# Altium PCB MCU-Board.PcbDoc
Units mm, origin at the board's own origin, x right, y up, seen from the top; angles counter-clockwise.
Board outline 45 x 45 mm, 2 copper layers (Top Layer, Bottom Layer), stack 1.671 mm thick; 35 components, 30 nets, 207 pads, 4 vias.
Unrouted connection lines stored in the file: 103.
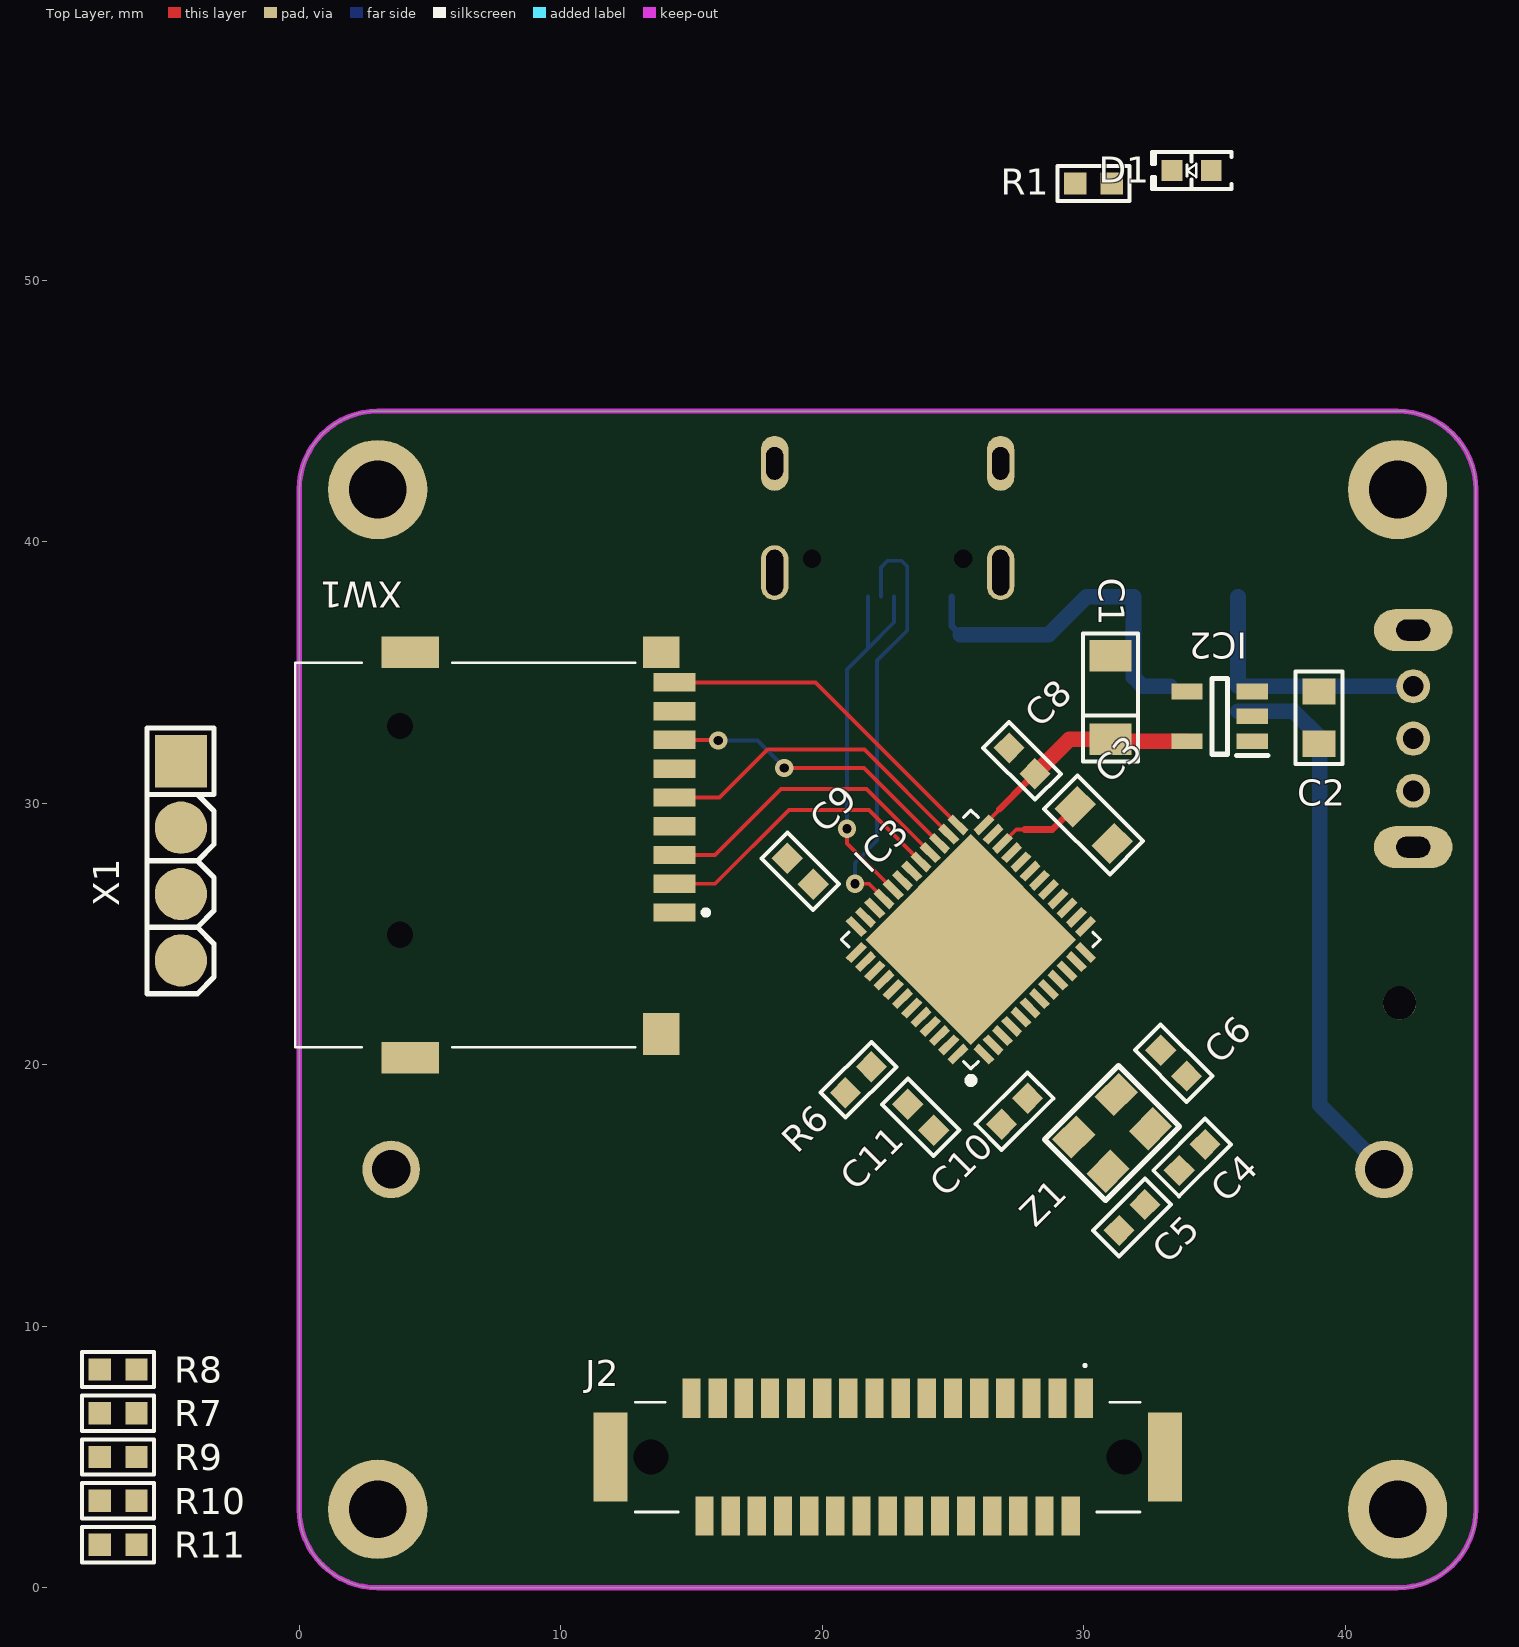
[diagram p0: Top Layer view]
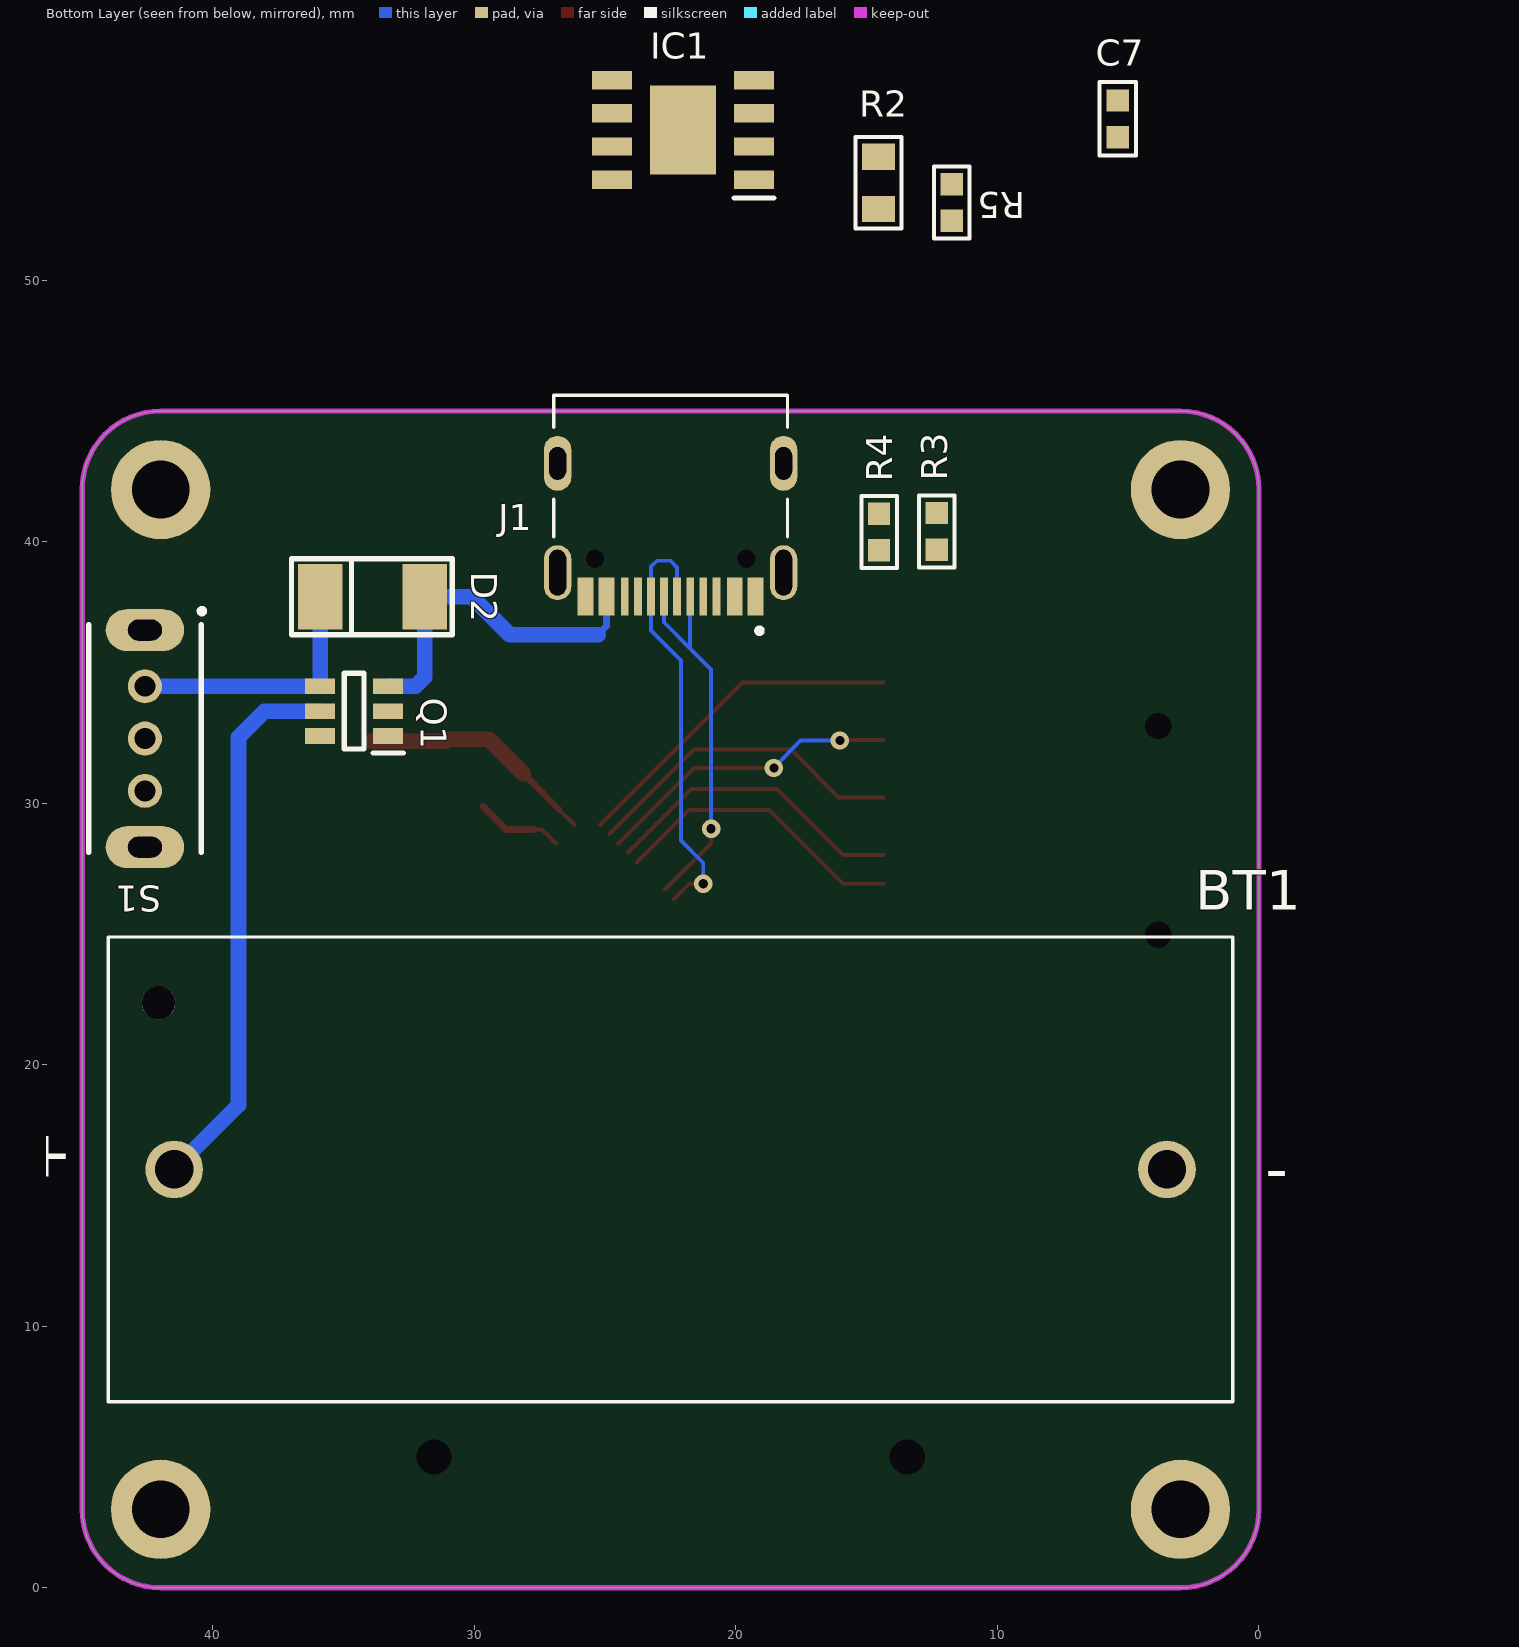
[diagram p1: Bottom Layer view, seen from below]

## Layer stack, top to bottom
Top Solder: solder mask 0.0102, Solder Resist, Dk 3.5
Top Layer: signal copper 0.0356
Dielectric 1: dielectric 1.6, FR-4, Dk 4.8
Bottom Layer: signal copper 0.0356
Bottom Solder: solder mask 0.0102, Solder Resist, Dk 3.5

## Board outline
0,3 0,42 cw(c3,42) 3,45 42,45 cw(c42,42) 45,42 45,3 cw(c42,3) 42,0 3,0 cw(c3,3)

## Design rules (kind name [scope] priority, off if disabled: settings)
BoardOutlineClearance [All] p1: gap=0.2 ignorepadtopadclearanceinfootprint=FALSE
Clearance [All] p1: gap=0.254 ignorepadtopadclearanceinfootprint=FALSE except(0.127: SMDPad-SMDPad; 0.33: Arc-THPad Track-THPad; 0.5: THPad-THPad)
HoleSize [All] p1: absolutevalues=TRUE maxlimit=6.3 minlimit=0.2 maxpercent=80.000 minpercent=20.000
MinimumSolderMaskSliver MinimumSolderMaskSliver_TSSOP [HasFootprint('20-TSSOP')] p1: minsoldermaskwidth=0.2
MinimumSolderMaskSliver [All] p2: minsoldermaskwidth=0.2
PolygonConnect PolygonConnectMSOP [HasFootprint('10-MSOP')] p1: thpad.connectstyle=Relief thpad.reliefconductorwidth=0.18 thpad.reliefentries=4 thpad.polygonreliefangle="90 Angle" thpad.airgapwidth=0.254 smdpad.connectstyle=Direct smdpad.reliefconductorwidth=0.18 smdpad.reliefentries=4 smdpad.polygonreliefangle="90 Angle" smdpad.airgapwidth=0.254 via.connectstyle=Direct via.reliefconductorwidth=0.18 via.reliefentries=4 via.polygonreliefangle="90 Angle" via.airgapwidth=0.254
PolygonConnect [All] p2: thpad.connectstyle=Relief thpad.reliefconductorwidth=0.254 thpad.reliefentries=4 thpad.polygonreliefangle="90 Angle" thpad.airgapwidth=0.254 smdpad.connectstyle=Relief smdpad.reliefconductorwidth=0.254 smdpad.reliefentries=4 smdpad.polygonreliefangle="90 Angle" smdpad.airgapwidth=0.254 via.connectstyle=Direct via.reliefconductorwidth=0.254 via.reliefentries=4 via.polygonreliefangle="90 Angle" via.airgapwidth=0.254
RoutingCorners [All] p1: cornerstyle=45-Degree minsetback=1.27 maxsetback=1.27
RoutingVias [All] p1: holewidth=0.35 width=0.7 viastyle="Through Hole" minholewidth=0.25 minwidth=0.5 maxholewidth=0.5 maxwidth=1
SMDEntry [All] p1: side=TRUE corner=FALSE anyangle=FALSE
SMDToCorner [All] p1: distance=0
SilkToSolderMaskClearance [IsPad] p1: minsilkscreentomaskgap=0.15 clearancetoexposedcopper=TRUE
SolderMaskExpansion [All] p1: expansion=0.05 istentingtop=FALSE
UnRoutedNet [All] p1: checkbadconnections=TRUE
Width Default [All] p1: maxlimit=0.6 minlimit=0.15 preferedwidth=0.254 minimp=50.000000 maximp=50.000000 favimp=50.000000
25 further rules are at their usual default settings.

## Components (designator, comment, footprint, x,y, rotation, side; value= is the part's Value field where it differs from the comment)
BT1 "BH123A" BAT_BH123A 22.5,16 r0 bottom locked
C1 "10u" "CAP: TANTAL-A" 31.025,34.05 r90 top
C2 "10u" "CAP: 0805" 39,33.275 r90 top
C3 "2.2u" "CAP: 0805" 30.378,29.168 r135 top
C4 "8p" "CAP: 0603" 34.144,16.458 r45 top
C5 "8p" "CAP: 0603" 31.846,14.16 r45 top
C6 "100n" "CAP: 0603" 33.437,20.064 r135 top
C7 "100n" "CAP: 0603" 5.4,56.175 r90 bottom
C8 "100n" "CAP: 0603" 27.639,31.624 r315 top
C9 "100n" "CAP: 0603" 19.161,27.403 r315 top
C10 "100n" "CAP: 0603" 27.355,18.226 r45 top
C11 "100n" "CAP: 0603" 23.768,17.995 r135 top
D1 "=VALUE" "LED 0603_1608" 34.125,54.2 r180 top
D2 "1N4007" "DIODE: SMA" 33.9,37.9 r0 bottom
IC1 "TP4056" SOIC127P600X175-9N 22.025,55.75 r0 bottom
IC2 "LP2981IM5X-3.3" SOT95P280X145-5N 35.2,33.325 r180 top
IC3 "STM32F401CCU6" QFN50P700X700X60-49N-D 25.686,24.792 r135 top
J1 "TYPE-C" HRO_TYPE-C-31-M-12 22.5,43 r0 bottom
J2 "DF9-31P-1V_32_" DF931P1V32 22.5,5 r180 top
Q1 "IRLMS6802TRPBF" SOT95P280X130-6N 34.6,33.525 r0 bottom
R1 "Resistor film, 680R, , 0201, 0.05W, -55...+125°C" "RES: 0603" 30.375,53.7 r180 top value=680R
R2 "Resistor film, 1.2k, , 0201, 0.05W, -55...+125°C" "RES: 0805" 14.55,53.725 r90 bottom value=1.2k
R3 "Resistor film, 5.1k, , 0201, 0.05W, -55...+125°C" "RES: 0603" 12.325,40.4 r90 bottom value=5.1k
R4 "Resistor film, 5.1k, , 0201, 0.05W, -55...+125°C" "RES: 0603" 14.525,40.375 r90 bottom value=5.1k
R5 "Resistor film, 100k, , 0201, 0.05W, -55...+125°C" "RES: 0603" 11.75,52.975 r90 bottom value=100k
R6 "Resistor film, 9.1k, , 0201, 0.05W, -55...+125°C" "RES: 0603" 21.384,19.429 r45 top value=9.1k
R7 "Resistor film, 9.1k, , 0201, 0.05W, -55...+125°C" "RES: 0603" -6.925,6.675 r180 top value=9.1k
R8 "Resistor film, 9.1k, , 0201, 0.05W, -55...+125°C" "RES: 0603" -6.925,8.35 r180 top value=9.1k
R9 "Resistor film, 9.1k, , 0201, 0.05W, -55...+125°C" "RES: 0603" -6.925,5 r180 top value=9.1k
R10 "Resistor film, 9.1k, , 0201, 0.05W, -55...+125°C" "RES: 0603" -6.925,3.325 r180 top value=9.1k
R11 "Resistor film, 9.1k, , 0201, 0.05W, -55...+125°C" "RES: 0603" -6.925,1.65 r180 top value=9.1k
S1 "OS102011MA1QN1" OS102011MA1QN1 42.6,32.475 r270 bottom
X1 "" "CON: PLS-4R" -4.525,27.8 r270 top
XW1 "TFP09-2-12B" TFP09212B -0.15,28.025 r0 top
Z1 "Crystal, 25MHz, 6pF, ±50ppm, case 2016, -30...+85°C" "OSC: 3225" 31.085,17.395 r45 top

## Footprints (in the part's own frame and the unit in brackets; to place one, negate y for a bottom-side part, rotate by r counter-clockwise, add the part's x,y. Pads: shape width x height; smd on the part's side, far side on the other; paste and mask are expansions set on the pad)
BAT_BH123A [mm]
  round 2.205 hole 1.47: 1(18.985,0) 2(-18.985,0)
  round 1.27 hole 1.27 unplated: ""(19.58,-6.37)
  silkscreen extent -21.5,-8.89 21.5,8.89, body extent -21.61,-9.1 21.71,9.15, height 14.25
"CAP: 0603" [mm]
  rect 0.85x0.85 smd: 1(-0.7,0) 2(0.7,0)
  silkscreen extent -1.4,-0.7 1.4,0.7, body extent -0.8,-0.4 0.8,0.4, height 0.3
"CAP: 0805" [mm]
  rect 1x1.25 smd: 1(-1,0) 2(1,0)
  silkscreen extent -1.78,-0.9 1.78,0.9, body extent -1,-0.62 1,0.63, height 0.78
"CAP: TANTAL-A" [mm]
  rect 1.2x1.6 smd: 1(-1.6,0) 2(1.6,0)
  silkscreen extent -2.45,-1.05 2.45,1.05, body extent -1.7,-0.84 1.7,0.84, height 1.71
"CON: PLS-4R" [mm] "PLS-4R 4 pin header"
  rect 2x2 smd: 1(-3.81,0)
  round 2 smd: 2(-1.27,0) 3(1.27,0) 4(3.81,0)
  silkscreen extent -5.08,-1.3 5.08,1.27
DF931P1V32 [mm]
  rect 0.7x1.5 smd: 1(-7.5,-2.25) 2(-7,2.25) 3(-6.5,-2.25) 4(-6,2.25) 5(-5.5,-2.25) 6(-5,2.25) 7(-4.5,-2.25) 8(-4,2.25) 9(-3.5,-2.25) 10(-3,2.25) 11(-2.5,-2.25) 12(-2,2.25) 13(-1.5,-2.25) 14(-1,2.25) 15(-0.5,-2.25) 16(0,2.25) 17(0.5,-2.25) 18(1,2.25) 19(1.5,-2.25) 20(2,2.25) 21(2.5,-2.25) 22(3,2.25) 23(3.5,-2.25) 24(4,2.25) 25(4.5,-2.25) 26(5,2.25) 27(5.5,-2.25) 28(6,2.25) 29(6.5,-2.25) 30(7,2.25) 31(7.5,-2.25)
  round 0.675 hole 1.35 unplated: MH1(-9.05,0) MH2(9.05,0)
  rect 1.3x3.4 smd: MP1(-10.6,0) MP2(10.6,0)
  silkscreen extent -9.65,-3.55 9.65,2.1, body extent -10.55,-2.81 10.55,2.79, height 3.29
"DIODE: SMA" [mm]
  rect 1.7x2.5 smd: 1(-2,0) 2(2,0)
  round 0.5 on Mech1: ""(2,0.9)
  silkscreen extent -3.05,-1.45 3.1,1.45, body extent -2.5,-1.35 2.5,1.35, height 2.28
HRO_TYPE-C-31-M-12 [mm]
  rect 0.6x1.45 smd: A1B12(-3.25,5.095) A4B9(-2.45,5.095) B1A12(3.25,5.095) B4A9(2.45,5.095)
  rect 0.3x1.45 smd: A5(-1.25,5.095) A6(-0.25,5.095) A7(0.25,5.095) A8(1.25,5.095) B5(1.75,5.095) B6(0.75,5.095) B7(-0.75,5.095) B8(-1.75,5.095)
  oval 1.05x2.1 hole 0.65 slot 1.75 at 90 deg: S1(-4.32,4.18) S2(4.32,4.18)
  oval 1.05x2.1 hole 0.65 slot 1.25 at 90 deg: S3(-4.32,0) S4(4.32,0)
  round 0 hole 0.7 unplated: ""(-2.89,3.65) ""(2.89,3.65)
  silkscreen extent -4.47,-2.6 4.47,6.5, body extent -4.47,-2.6 4.47,5.31, height 3.31
"LED 0603_1608" [mm] "Chip Diode, 2-Leads, Body 1.60x0.80mm, IPC Medium Density"
  rect 0.8x0.8 smd: 1(-0.75,0) 2(0.75,0)
  silkscreen extent -1.52,-0.7 1.52,0.7, body extent -0.8,-0.4 0.8,0.4, height 0.53
OS102011MA1QN1 [mm]
  round 1.3 hole 0.8: 1(-2,0) 2(0,0) 3(2,0)
  oval 1.6x3 hole 0.8 slot 1.3 at 90 deg: 4(-4.15,0) 5(4.15,0)
  silkscreen extent -4.97,-2.15 4.35,2.27, body extent -4.3,-4.7 4.3,2.24, height 4.7
"OSC: 3225" [mm]
  rect 1.3x1.05 smd: 1(-1.15,-0.925) 2(1.15,-0.925) 3(1.15,0.925) 4(-1.15,0.925)
  round 0.5 on Top Overlay: ""(-2.5,-1.5)
  silkscreen extent -2,-1.65 2,1.65, body extent -1.6,-1.25 1.6,1.25, height 0.81
QFN50P700X700X60-49N-D [mm]
  rect 0.85x0.3 smd: 1(-3.45,2.75) 2(-3.45,2.25) 3(-3.45,1.75) 4(-3.45,1.25) 5(-3.45,0.75) 6(-3.45,0.25) 7(-3.45,-0.25) 8(-3.45,-0.75) 9(-3.45,-1.25) 10(-3.45,-1.75) 11(-3.45,-2.25) 12(-3.45,-2.75) 25(3.45,-2.75) 26(3.45,-2.25) 27(3.45,-1.75) 28(3.45,-1.25) 29(3.45,-0.75) 30(3.45,-0.25) 31(3.45,0.25) 32(3.45,0.75) 33(3.45,1.25) 34(3.45,1.75) 35(3.45,2.25) 36(3.45,2.75)
  rect 0.3x0.85 smd: 13(-2.75,-3.45) 14(-2.25,-3.45) 15(-1.75,-3.45) 16(-1.25,-3.45) 17(-0.75,-3.45) 18(-0.25,-3.45) 19(0.25,-3.45) 20(0.75,-3.45) 21(1.25,-3.45) 22(1.75,-3.45) 23(2.25,-3.45) 24(2.75,-3.45) 37(2.75,3.45) 38(2.25,3.45) 39(1.75,3.45) 40(1.25,3.45) 41(0.75,3.45) 42(0.25,3.45) 43(-0.25,3.45) 44(-0.75,3.45) 45(-1.25,3.45) 46(-1.75,3.45) 47(-2.25,3.45) 48(-2.75,3.45)
  rect 5.7x5.7 smd: 49(0,0)
  silkscreen extent -3.93,-3.5 3.5,3.93, body extent -3.55,-3.55 3.55,3.55, height 0.6
"RES: 0603" [mm]
  rect 0.85x0.85 smd: 1(-0.7,0) 2(0.7,0)
  silkscreen extent -1.38,-0.67 1.38,0.67, body extent -0.8,-0.4 0.8,0.4, height 0.44
"RES: 0805" [mm]
  rect 1x1.25 smd: 1(-1,0) 2(1,0)
  silkscreen extent -1.75,-0.87 1.75,0.87, body extent -1,-0.6 1,0.6, height 0.48
SOIC127P600X175-9N [mm]
  rect 1.525x0.7 smd: 1(-2.712,1.905) 2(-2.712,0.635) 3(-2.712,-0.635) 4(-2.712,-1.905) 5(2.712,-1.905) 6(2.712,-0.635) 7(2.712,0.635) 8(2.712,1.905)
  rect 2.513x3.402 smd: 9(0,0)
  silkscreen extent -3.47,2.61 -1.95,2.61, body extent -3,-2.45 3,2.45, height 1.75
SOT95P280X130-6N [mm]
  rect 1.15x0.6 smd: 1(-1.3,0.95) 2(-1.3,0) 3(-1.3,-0.95) 4(1.3,-0.95) 5(1.3,0) 6(1.3,0.95)
  silkscreen extent -1.88,-1.45 0.38,1.6, body extent -1.4,-1.45 1.4,1.45, height 1.3
SOT95P280X145-5N [mm]
  rect 1.2x0.6 smd: 1(-1.25,0.95) 2(-1.25,0) 3(-1.25,-0.95) 4(1.25,-0.95) 5(1.25,0.95)
  silkscreen extent -1.85,-1.45 0.3,1.5, body extent -1.4,-1.45 1.4,1.45, height 1.2
TFP09212B [mm]
  rect 1.6x0.7 smd: 1(14.5,-2.2) 2(14.5,-1.1) 3(14.5,0) 4(14.5,1.1) 5(14.5,2.2) 6(14.5,3.3) 7(14.5,4.4) 8(14.5,5.5) 9(14.5,6.6)
  rect 1.4x1.2 smd: 10(14,7.75)
  rect 2.2x1.2 smd: 11(4.4,7.75) 12(4.4,-7.75)
  rect 1.4x1.6 smd: 13(14,-6.85)
  round 0.5 hole 1 unplated: MH1(4,-3.05) MH2(4,4.93)
  silkscreen extent 0,-7.35 15.8,7.35, body extent 0,-8 15.2,8.1, height 1.85

## Part data
BT1: "BATTERY HOLDER CR123A PC PIN", Package=None, Availability=Unavailable, MF=MPD, MP=BH123A, Price=None, SnapEDA_Link=https://www.snapeda.com/parts/BH123A/MPD/view-part/4389037/?ref=snap
C1: library part Capacitor_polar, "SMD Capacitor Polar"
C2 C3 C4 C5 C6 C7 C8 C9 C10 C11: library part Capacitor, "SMD Capacitor"
D1: library part LED, "Chip LED"
D2: library part Diode, "Rectifier Diode"
IC1: "Connector", Manufacturer_Name="NanJing Top Power", Datasheet Link=https://dlnmh9ip6v2uc.cloudfront.net/datasheets/Prototyping/TP4056.pdf, Height=1.75mm, Manufacturer_Part_Number=TP4056
IC2: "Integrated Circuit", Manufacturer_Name="Texas Instruments", Manufacturer_Part_Number=LP2981IM5X-5.0, Mouser Part Number=926-LP2981IM5X-50, Datasheet Link=https://www.ti.com/lit/ds/symlink/lp2981-n.pdf?ts=1629199672850&ref_url=https%253A%252F%252Fwww.ti.com%252Fstore%252Fti%252Fen%252Fp%252Fproduct%252F%253Fp%253DLP2981IM5X-5.0%252FNOPB, Height=1.45mm, Mouser Price/Stock=https://www.mouser.com/Search/Refine.aspx?Keyword=926-LP2981IM5X-50
IC3: "Integrated Circuit", Manufacturer_Name=STMicroelectronics, Mouser Part Number=511-STM32F401CCU6, Arrow Part Number=STM32F401CCU6, Arrow Price/Stock=https://www.arrow.com/en/products/stm32f401ccu6/stmicroelectronics?region=nac, Datasheet Link=http://www.st.com/web/en/resource/technical/document/datasheet/DM00086815.pdf, Height=0.6mm, Manufacturer_Part_Number=STM32F401CCU6, Mouser Price/Stock=https://www.mouser.co.uk/ProductDetail/STMicroelectronics/STM32F401CCU6?qs=DqCdCwOw4%2F5VrOZQxO795A%3D%3D
J1: library part TYPE-C-31-M-12, "USB Connectors 24 Receptacle 1 8.94*7.3mm RoHS", Package=None, Availability=Unavailable, MP=TYPE-C-31-M-12, Price=None
J2: "Connector", Arrow Part Number=DF9-31P-1V(32), Manufacturer_Name=Hirose, Mouser Part Number=798-DF9-31P-1V32, Arrow Price/Stock=https://www.arrow.com/en/products/df9-31p-1v-32/hirose-electric, Datasheet Link=https://datasheet.datasheetarchive.com/originals/distributors/SFDatasheet-7/sf-000141250.pdf, Height=3.5mm, Manufacturer_Part_Number=DF9-31P-1V(32), Mouser Price/Stock=https://www.mouser.co.uk/ProductDetail/Hirose-Connector/DF9-31P-1V32?qs=zOgoZG1CgI9P5hPtT7oVcw%3D%3D, System=Connector
Q1: "MOSFET (P-Channel)", Manufacturer_Name=Infineon, Mouser Part Number=942-IRLMS6802TRPBF, Arrow Part Number=IRLMS6802TRPBF, Arrow Price/Stock=https://www.arrow.com/en/products/irlms6802trpbf/infineon-technologies-ag, Datasheet Link=https://www.infineon.com/dgdl/irlms6802pbf.pdf?fileId=5546d462533600a401535669349a2654, Height=1.3mm, Manufacturer_Part_Number=IRLMS6802TRPBF, Mouser Price/Stock=https://www.mouser.co.uk/ProductDetail/Infineon-IR/IRLMS6802TRPBF?qs=9%252BKlkBgLFf3%252B6QUsVmNV1g%3D%3D
R1 R2 R3 R4 R5 R6 R7 R8 R9 R10 R11: library part Resistor, Manufacturer=Yageo, Package=0201, PartNumber=RC0201JR-07100RL, Power=0.05W, Temperature=-55...+125°C, TypeResistor="Resistor film", HelpURL=https://www.digikey.com/product-detail/en/yageo/RC0201JR-07100RL/311-100NCT-ND/1949006
  R1: ValueManufacturerPartNumber="Resistor film, 680R, , 0201, 0.05W, -55...+125°C"
  R2: ValueManufacturerPartNumber="Resistor film, 1.2k, , 0201, 0.05W, -55...+125°C"
  R3 R4: ValueManufacturerPartNumber="Resistor film, 5.1k, , 0201, 0.05W, -55...+125°C"
  R5: ValueManufacturerPartNumber="Resistor film, 100k, , 0201, 0.05W, -55...+125°C"
  R6 R7 R8 R9 R10 R11: ValueManufacturerPartNumber="Resistor film, 9.1k, , 0201, 0.05W, -55...+125°C"
S1: "Switch", Manufacturer_Name="C & K COMPONENTS", Mouser Part Number=611-OS102011MA1QN1, Arrow Part Number=OS102011MA1QN1, Arrow Price/Stock=https://www.arrow.com/en/products/os102011ma1qn1/ck?region=europe, Datasheet Link=http://www.ckswitches.com/media/1428/os.pdf, Manufacturer_Part_Number=OS102011MA1QN1, Mouser Price/Stock=https://www.mouser.co.uk/ProductDetail/CK/OS102011MA1QN1?qs=WtljUlYws5R6MUgHcLkz4w%3D%3D
X1: library part "Connector SWD", "SWD Interface"
XW1: "Connector", Manufacturer_Name=100y, Datasheet Link=http://images.100y.com.tw/pdf_file/10-TFP09-2-12B.pdf, Height=2.45mm, Manufacturer_Part_Number=TFP09-2-12B
Z1: library part Crystal, Frequency=25MHz, LoadCapacitance=6pF, Manufacturer="Murata Electronics", Package="case 2016", PartNumber=XRCGB25M000F0L00R0, Temperature=-30...+85°C, Tolerance=±50ppm, HelpURL=https://www.digikey.com/product-detail/en/murata-electronics-north-america/XRCGB25M000F0L00R0/490-5577-1-ND/2368391, TypeOscilator=Crystal, ValueManufacturerPartNumber="Crystal, 25MHz, 6pF, ±50ppm, case 2016, -30...+85°C"

## Free pads (board coordinates)
  round 3.8 hole 2.2: 5(3,3) 5(3,42) 5(42,3) 5(42,42)

## Via types
v1: diameter 0.7, hole 0.35, Top Layer to Bottom Layer, 4 vias

## Nets (pads, with @x,y where several pads share a name; then routed paths per layer and width w, separated by ;. In a path a pad name is that pad's centre, name@x,y a point inside that pad or via, vN(x,y) a via of type N, cw(c..) or ccw(c..) an arc to the next point about the centre after c; other vN are vias at no path point)
+3.3V: C1.1 C7.2 C8.2 C9.2 C10.2 C11.2 IC2.5 IC3.1 IC3.9 IC3.24 IC3.36 IC3.48 R7.2 R8.2 R9.2 R10.2 R11.2 X1.2 XW1.4 | length 9.2
  Top Layer w0.15: IC3.24 26.775,29.77 26.775,29.775
  Top Layer w0.254: 26.775,29.775 27.829,30.829 27.834,30.829 C8.2
  Top Layer w0.6: C8.2 29.455,32.45 C1.1 31.1,32.375 IC2.5
+5V: D2.1 IC1.4 IC1.8 J1.A4B9 J1.B4A9 Q1.3 R5.2 | length 13.4
  Bottom Layer w0.254: J1.B4A9 24.95,36.775 25.275,36.45
  Bottom Layer w0.6: 25.275,36.45 28.653,36.45 30.103,37.9 D2.1 31.9,34.826 32.251,34.475 Q1.3
GND: BT1.2 C1.2 C2.1 C3.1 C4.1 C5.2 C6.1 C7.1 C8.1 C9.1 C10.1 C11.1 D1.1 IC1.1 IC1.3 IC2.2 IC3.8 IC3.23 IC3.35 IC3.47 IC3.49 J1.A1B12 J1.B1A12 J1.S1 J1.S2 J1.S3 J1.S4 J2.20 J2.22 J2.24 J2.26 J2.28 J2.30 R2.1 R3.1 R4.1 R5.1 R6.1 X1.4 XW1.6 XW1.10 XW1.11 XW1.12 XW1.13 Z1.2 Z1.4
NetC3_2: C3.2 IC3.22 | length 3.4
  Top Layer w0.15: IC3.22 27.419,29 27.75,29
  Top Layer w0.254: 27.75,29 28.796,29 C3.2
NetC4_2: C4.2 IC3.6 Z1.3
NetC5_1: C5.1 IC3.5 Z1.1
NetC6_2: C6.2 IC3.7
NetD1_2: D1.2 R1.2
NetD2_2: D2.2 Q1.4 S1.1 | length 10.1
  Bottom Layer w0.6: D2.2 Q1.4 S1.1
NetIC1_2: IC1.2 R2.2
NetIC1_7: IC1.7 R1.1
NetIC3_44: IC3.44 R6.2
NetJ1_A5: J1.A5 R3.2
NetJ1_B5: J1.B5 R4.2
PWRKEY_MCU: IC3.46 J2.9
SD_CS: IC3.29 R10.1 XW1.2 | length 11.4
  Top Layer w0.15: XW1.2 15.9,26.925 18.725,29.75 21.788,29.75 IC3.29
SD_Detect: IC3.25 R11.1 XW1.9 | length 13.1
  Top Layer w0.15: XW1.9 19.742,34.625 IC3.25
SD_MISO: IC3.27 R7.1 XW1.7 | length 11.8
  Top Layer w0.15: XW1.7 16,32.425 v1(16.025,32.4) ; v1(18.55,31.35) 21.602,31.35 IC3.27
  Bottom Layer w0.15: v1(16.025,32.4) 17.525,32.4 18.55,31.375 v1(18.55,31.35)
SD_MOSI: IC3.28 R9.1 XW1.3 | length 11.8
  Top Layer w0.15: XW1.3 15.9,28.025 18.425,30.55 21.695,30.55 IC3.28
SD_SCK: IC3.26 R8.1 XW1.5 | length 12.6
  Top Layer w0.15: XW1.5 16.075,30.225 17.9,32.05 21.61,32.05 IC3.26
SWCLK: IC3.37 X1.3
SWDIO: IC3.34 X1.1
UART1_RX: IC3.43 J2.7
UART1_TX: IC3.42 J2.5
UART2_RX: IC3.13 J2.3
UART2_TX: IC3.12 J2.1
USB_DN: IC3.32 J1.A7 J1.B7 | length 14.7
  Top Layer w0.15: v1(20.95,29.025) 20.95,28.467 IC3.32
  Bottom Layer w0.15: v1(20.95,29.025) 20.95,35.125 21.75,35.925 ; J1.B7 21.75,35.925 ; J1.A7 22.75,36.925 21.75,35.925
USB_DP: IC3.33 J1.A6 J1.B6 | length 16.6
  Top Layer w0.15: v1(21.25,26.925) 21.785,26.925 IC3.33
  Bottom Layer w0.15: v1(21.25,26.925) 21.25,27.725 22.1,28.575 22.1,35.454 23.25,36.604 J1.B6 23.25,39.05 23.025,39.275 22.5,39.275 22.25,39.025 J1.A6
VBATT: BT1.1 IC1.5 Q1.1 Q1.2 Q1.5 Q1.6 | length 21.1
  Bottom Layer w0.6: Q1.5 38.025,33.525 39.025,32.525 39.025,18.46 BT1.1
VCC: C2.2 IC2.1 IC2.3 J2.2 J2.4 J2.6 J2.8 J2.10 J2.12 S1.2
pads on no net: BT1. D2. IC1.6 IC1.9 IC2.4 IC3.2 IC3.3 IC3.4 IC3.10 IC3.11 IC3.14 IC3.15 IC3.16 IC3.17 IC3.18 IC3.19 IC3.20 IC3.21 IC3.30 IC3.31 IC3.38 IC3.39 IC3.40 IC3.41 IC3.45 J1. J1.A8 J1.B8 J2.11 J2.13 J2.14 J2.15 J2.16 J2.17 J2.18 J2.19 J2.21 J2.23 J2.25 J2.27 J2.29 J2.31 J2.MH1 J2.MH2 J2.MP1 J2.MP2 S1.3 S1.4 S1.5 XW1.1 XW1.8 XW1.MH1 XW1.MH2 Z1.

## Keep-outs
Keep-Out Layer:
  the board outline again, w0.2

## Text inside footprints (layer, text, board x,y; h text height)
BT1: Bottom Overlay "+" at 45.36,17.27 h1.78 r180; Bottom Overlay "-" at -1.122,16.508 h1.78 r180; Mechanical 13 "+" at 45.36,17.27 h1.78 r180; Mechanical 13 "-" at -1.122,16.508 h1.78 r180